# Altium PCB board.PcbDoc
Units mm, origin at the board's own origin, x right, y up, seen from the top; angles counter-clockwise.
Board outline 67.06 x 57.66 mm, 2 copper layers (Top Layer, Bottom Layer); 44 components, 74 nets, 216 pads, 48 vias.
Unrouted connection lines stored in the file: 1.
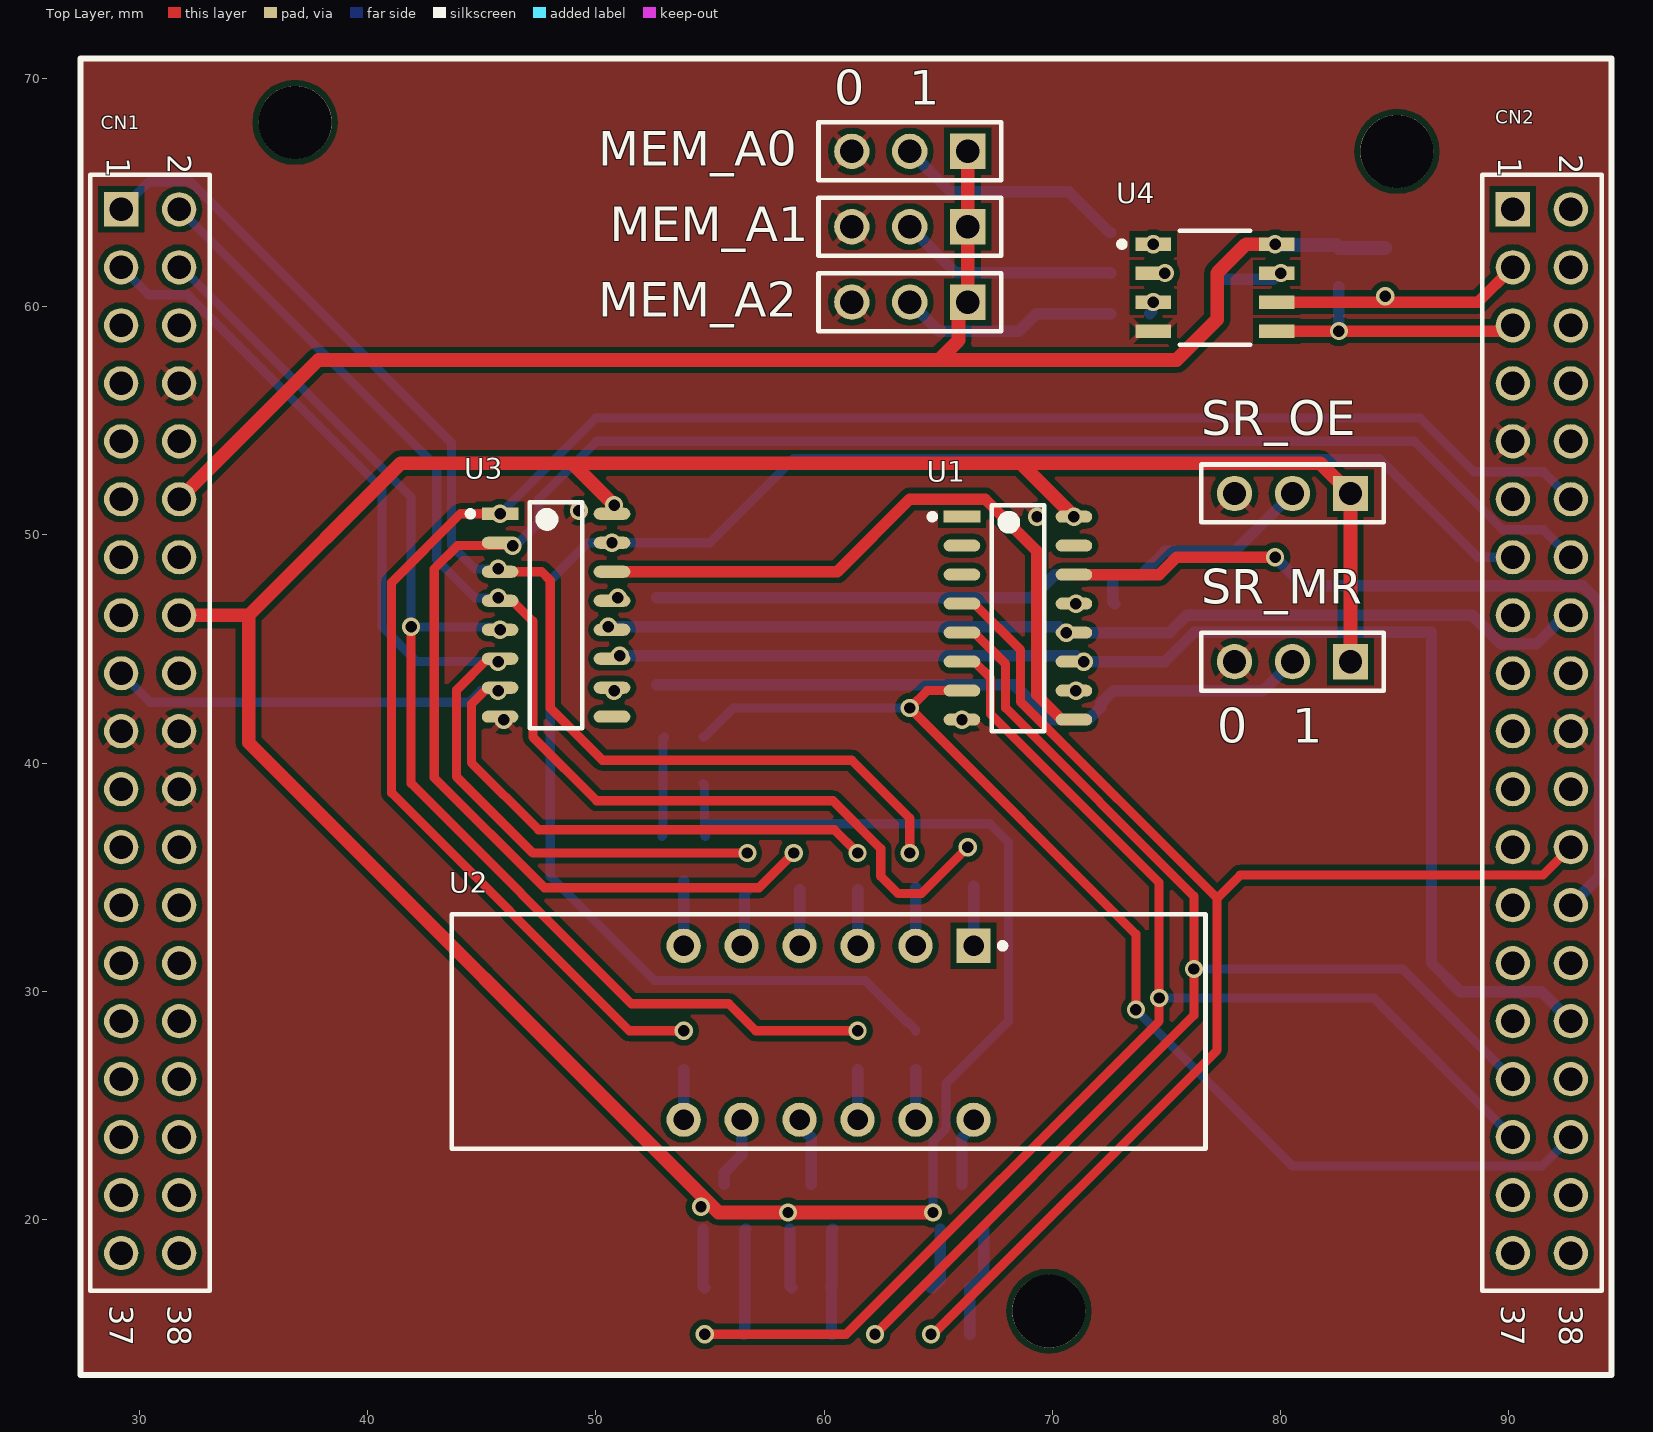
[diagram p0: Top Layer view]
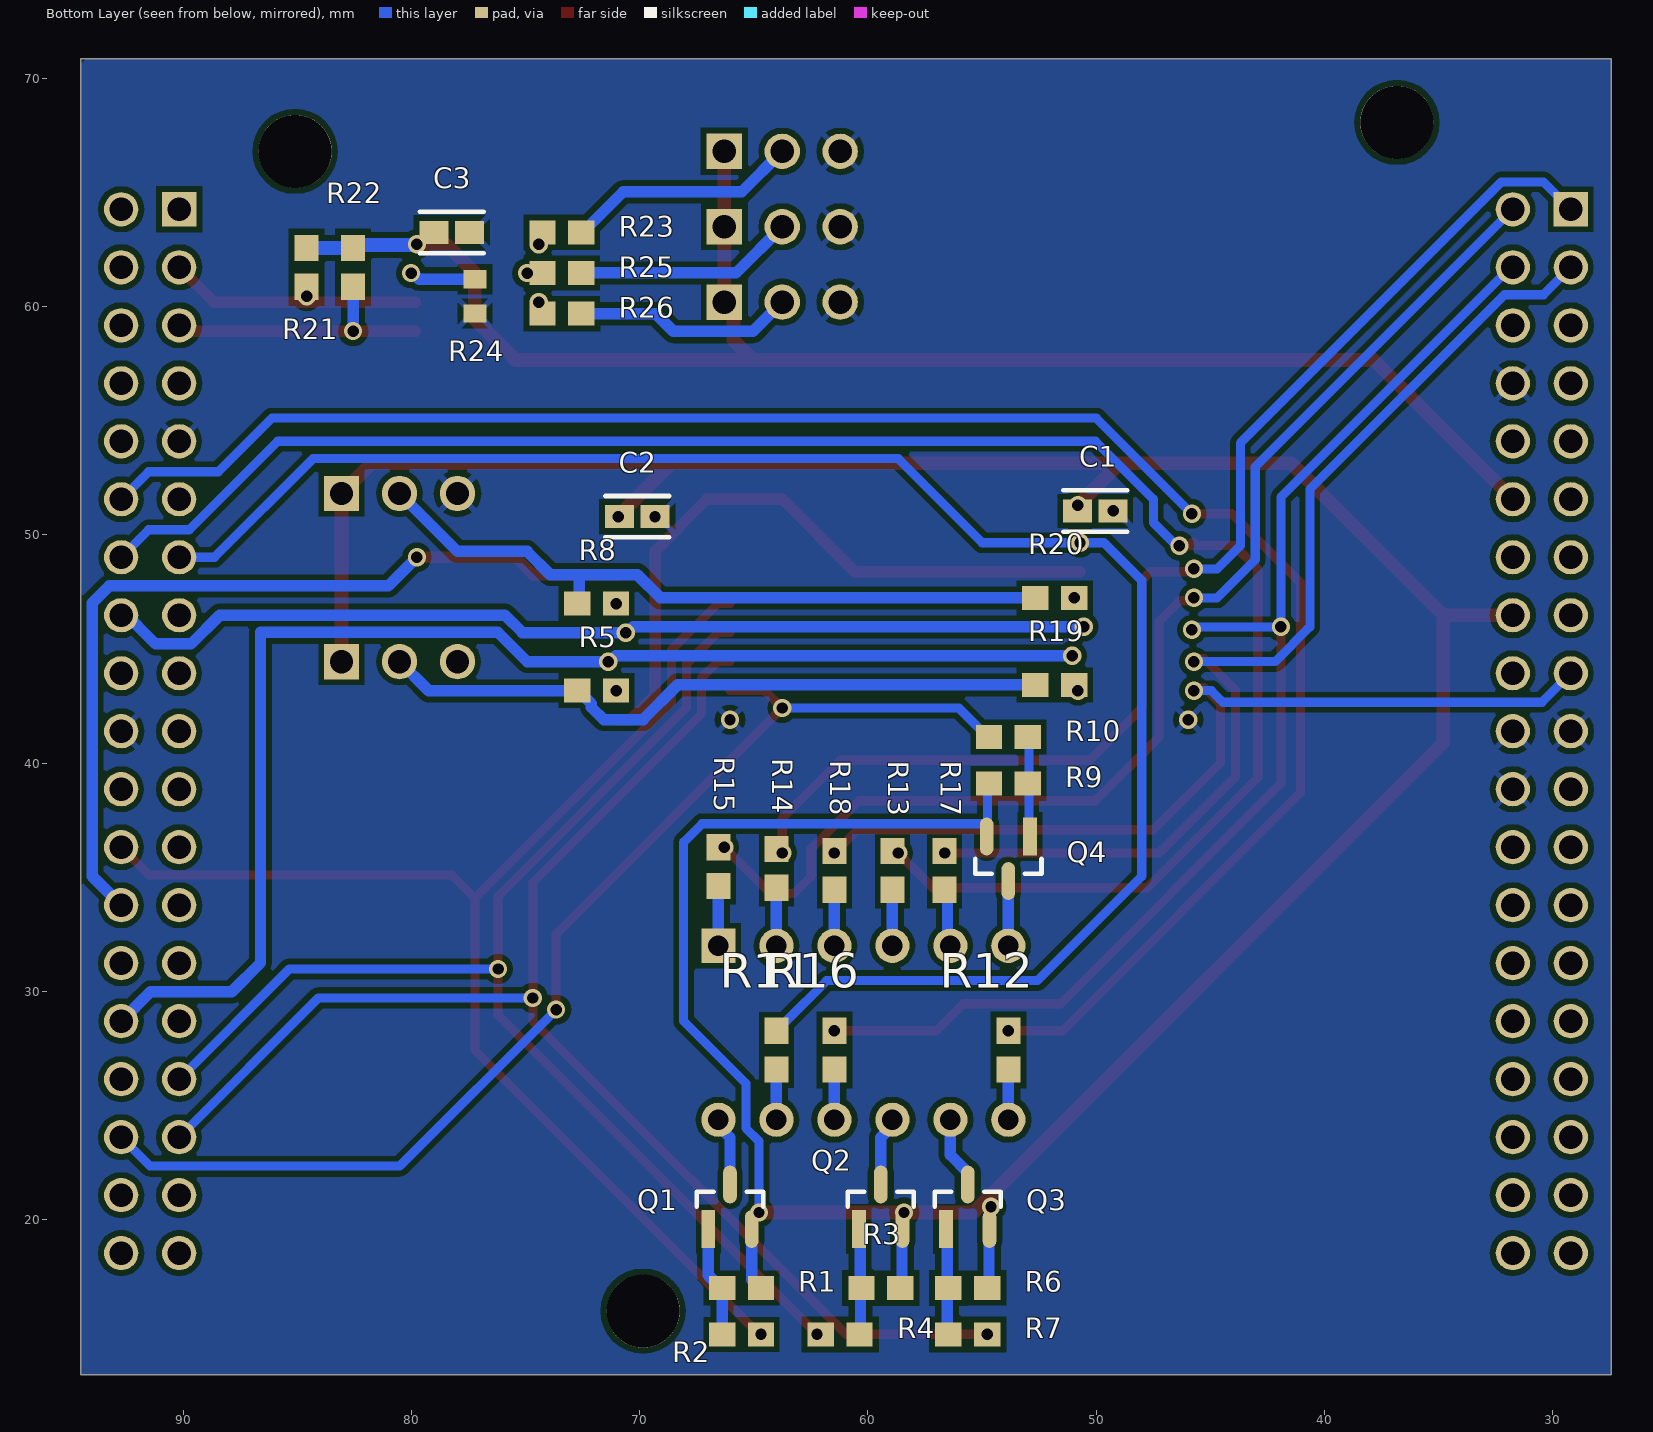
[diagram p1: Bottom Layer view, seen from below]
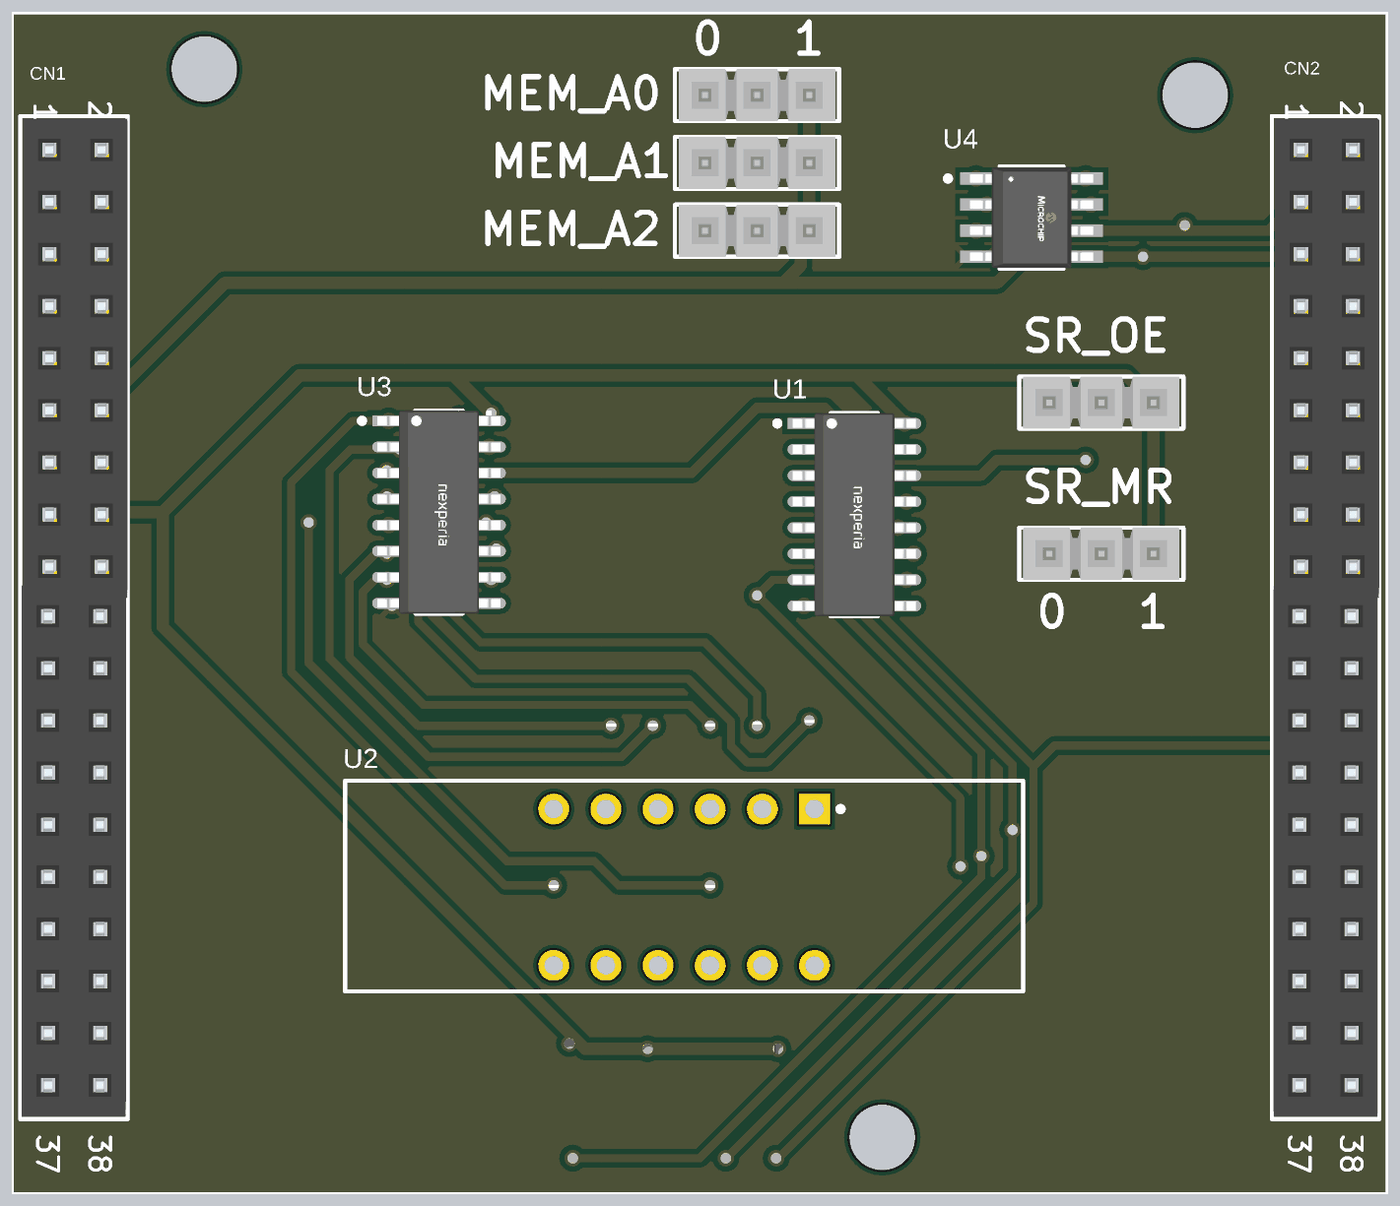
[diagram p2: 3D render of the assembled board from above, using the file's embedded part models]
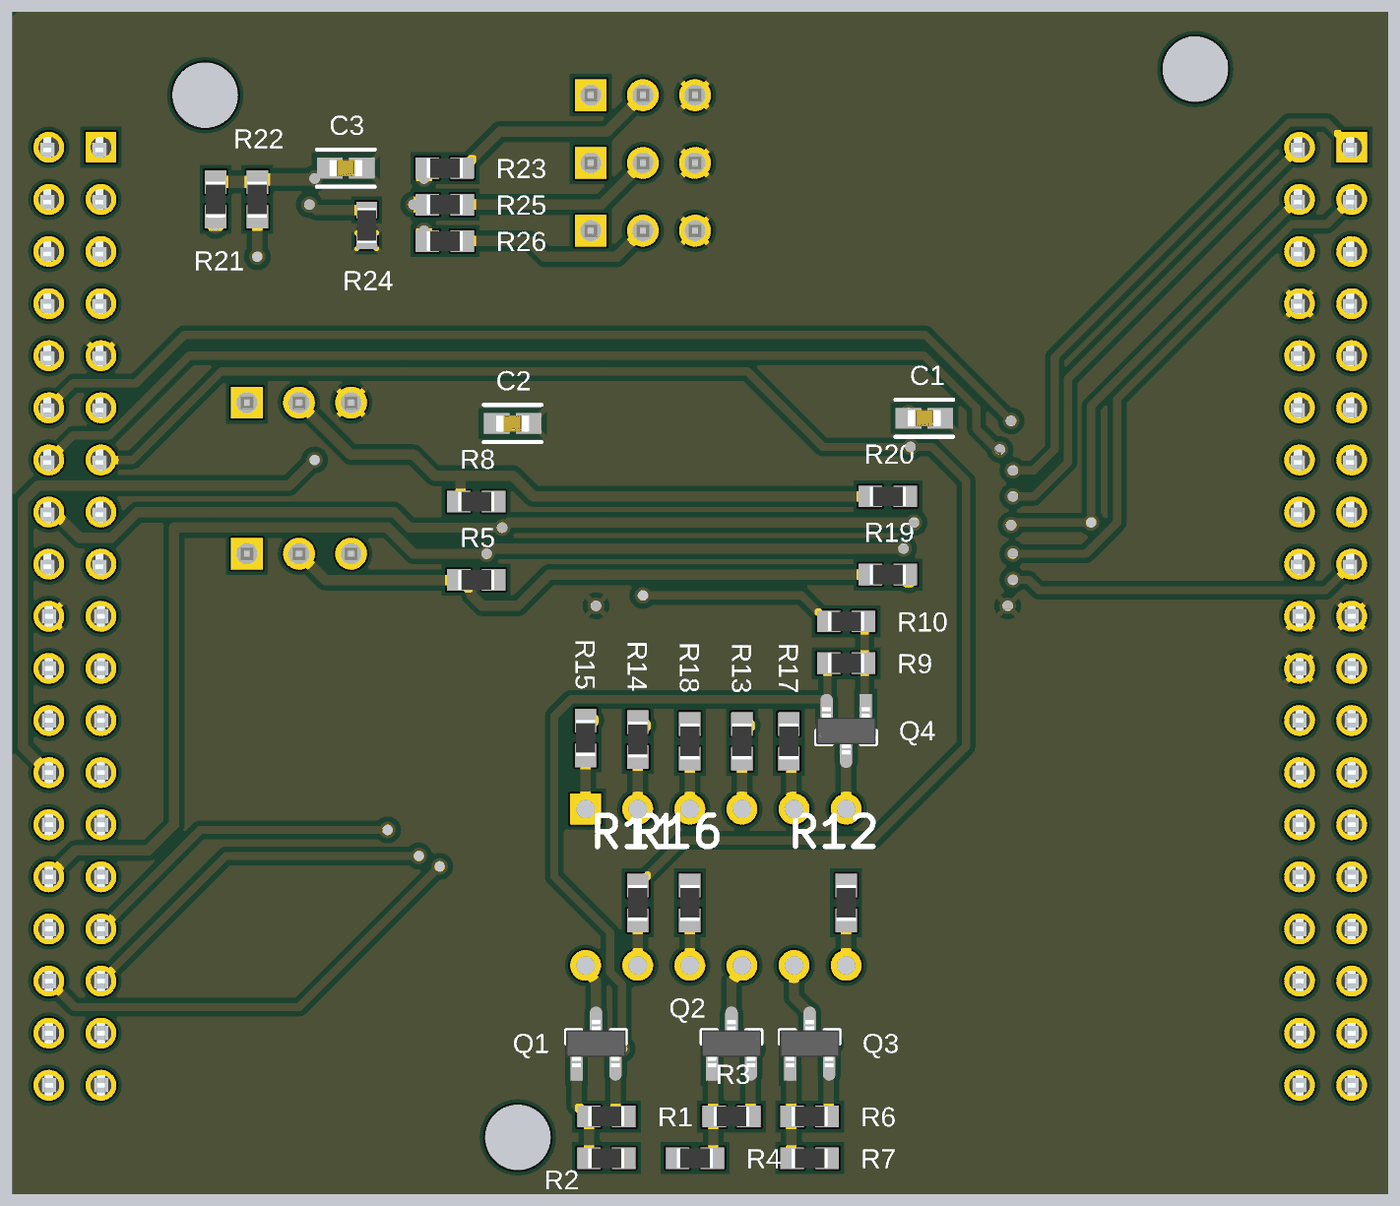
[diagram p3: 3D render of the assembled board from below, using the file's embedded part models]

## Layer stack, top to bottom
Top Solder: solder mask 0.0102, Solder Resist, Dk 3.5
Top Layer: signal copper 0.0356
Dielectric 1: dielectric 0.32, FR-4, Dk 4.8
Bottom Layer: signal copper 0.0356
Bottom Solder: solder mask 0.0102, Solder Resist, Dk 3.5

## Board outline
27.432,13.208 27.432,70.866 94.488,70.866 94.488,13.208

## Design rules (kind name [scope] priority, off if disabled: settings)
Clearance [All] p1: gap=0.254 ignorepadtopadclearanceinfootprint=FALSE
PlaneConnect [All] p1: planeconnectstyle=Direct reliefexpansion=0.508 reliefentries=4 reliefconductorwidth=0.254 reliefairgap=0.254
PolygonConnect [All] p1: connectstyle=Relief reliefconductorwidth=0.254 reliefentries=4 polygonreliefangle="45 Angle" airgapwidth=0.254
RoutingVias [All] p1: holewidth=0.5 width=0.8 viastyle="Through Hole" minholewidth=0.5 minwidth=0.8 maxholewidth=5 maxwidth=10
SolderMaskExpansion [All] p1: expansion=0.102
Width [All] p1: maxlimit=1 minlimit=0.4 preferedwidth=0.5
29 further rules are at their usual default settings.

## Components (designator, comment, footprint, x,y, rotation, side; value= is the part's Value field where it differs from the comment)
C1 "UMK107BJ104KAHT" FP-0603-L_1_6_0_1-W_0_8_0-IPC_A 50.038,51.054 r0 bottom
C2 "UMK107BJ104KAHT" FP-0603-L_1_6_0_1-W_0_8_0-IPC_A 70.104,50.8 r0 bottom
C3 "UMK107BJ104KAHT" FP-0603-L_1_6_0_1-W_0_8_0-IPC_A 78.232,63.246 r0 bottom
CN1 "Header 19X2" "header 38" 29.21,64.262 r270 top locked
CN2 "Header 19X2" "header 38" 90.17,64.262 r270 top locked
MEM_A0 "TSW-103-07-F-S" SMTC-TSW-103-07-X-S 66.294,66.802 r180 top
MEM_A1 "TSW-103-07-F-S" SMTC-TSW-103-07-X-S 66.294,63.5 r180 top
MEM_A2 "TSW-103-07-F-S" SMTC-TSW-103-07-X-S 66.294,60.198 r180 top
Q1 "BC807-40,215" FP-SOT23-IPC_A 66.04,20.574 r90 bottom
Q2 "BC807-40,215" FP-SOT23-IPC_A 59.436,20.574 r90 bottom
Q3 "BC807-40,215" FP-SOT23-IPC_A 55.626,20.574 r90 bottom
Q4 "BC807-40,215" FP-SOT23-IPC_A 53.848,35.814 r270 bottom
R1 "ERJ3EKF1002V" RESC1609X55X30ML15T15 65.532,17.018 r180 bottom value=100k
R2 "ERJ3EKF1002V" RESC1609X55X30ML15T15 65.532,14.986 r0 bottom value=10k
R3 "ERJ3EKF1002V" RESC1609X55X30ML15T15 59.436,17.018 r180 bottom value=100k
R4 "ERJ3EKF1002V" RESC1609X55X30ML15T15 61.214,14.986 r180 bottom value=10k
R5 "ERJ-3EKF4701V" RESC1608X55X30ML15T15 71.882,43.18 r0 bottom value=4k7
R6 "ERJ3EKF1002V" RESC1609X55X30ML15T15 55.626,17.018 r180 bottom value=100k
R7 "ERJ3EKF1002V" RESC1609X55X30ML15T15 55.626,14.986 r0 bottom value=10k
R8 "ERJ-3EKF4701V" RESC1608X55X30ML15T15 71.882,46.99 r0 bottom value=4k7
R9 "ERJ3EKF1002V" RESC1609X55X30ML15T15 53.848,39.116 r0 bottom value=100k
R10 "ERJ3EKF1002V" RESC1609X55X30ML15T15 53.848,41.148 r180 bottom value=10k
R11 "ERJ3EKF1002V" RESC1609X55X30ML15T15 64.008,27.432 r270 bottom value=220
R12 "ERJ3EKF1002V" RESC1609X55X30ML15T15 53.848,27.432 r270 bottom value=220
R13 "ERJ3EKF1002V" RESC1609X55X30ML15T15 58.928,35.306 r270 bottom value=220
R14 "ERJ3EKF1002V" RESC1609X55X30ML15T15 64.008,35.394 r270 bottom value=220
R15 "ERJ3EKF1002V" RESC1609X55X30ML15T15 66.548,35.472 r270 bottom value=220
R16 "ERJ3EKF1002V" RESC1609X55X30ML15T15 61.468,27.432 r270 bottom value=220
R17 "ERJ3EKF1002V" RESC1609X55X30ML15T15 56.642,35.306 r270 bottom value=220
R18 "ERJ3EKF1002V" RESC1609X55X30ML15T15 61.468,35.306 r270 bottom value=220
R19 "ERJ-3EKF4701V" RESC1608X55X30ML15T15 51.816,43.434 r0 bottom value=4k7
R20 "ERJ-3EKF4701V" RESC1608X55X30ML15T15 51.816,47.244 r0 bottom value=4k7
R21 "ERJ-3EKF4701V" RESC1608X55X30ML15T15 84.582,61.722 r90 bottom value=4k7
R22 "ERJ-3EKF4701V" RESC1608X55X30ML15T15 82.55,61.722 r90 bottom value=4k7
R23 "ERJ-3EKF4701V" RESC1608X55X30ML15T15 73.406,63.246 r180 bottom value=4k7
R24 "RC0603FR-074K7L" RESC1608X55X25ML10T15 77.216,60.452 r270 bottom
R25 "ERJ-3EKF4701V" RESC1608X55X30ML15T15 73.406,61.468 r180 bottom value=4k7
R26 "ERJ-3EKF4701V" RESC1608X55X30ML15T15 73.406,59.69 r180 bottom value=4k7
SR_MR "TSW-103-07-F-S" SMTC-TSW-103-07-X-S 83.058,44.45 r180 top
SR_OE "TSW-103-07-F-S" SMTC-TSW-103-07-X-S 83.058,51.816 r180 top
U1 "74HC595D,118" FP-SOT109-1-IPC_C 68.491,46.355 r0 top
U2 "2481A" 2481A 61.468,28.194 r180 top
U3 "74HC595D,118" FP-SOT109-1-IPC_C 48.26,46.482 r0 top
U4 "AT24C256C-SSHL-T" FP-C04-057-SN-MFG 77.122,60.833 r0 top

## Footprints (in the part's own frame and the unit in brackets; to place one, negate y for a bottom-side part, rotate by r counter-clockwise, add the part's x,y. Pads: shape width x height; smd on the part's side, far side on the other; paste and mask are expansions set on the pad)
2481A [mm]
  rect 1.5x1.5 hole 0.9: 1(-5.08,-3.81)
  round 1.5 hole 0.9: 2(-2.54,-3.81) 3(0,-3.81) 4(2.54,-3.81) 5(5.08,-3.81) 6(7.62,-3.81) 7(7.62,3.81) 8(5.08,3.81) 9(2.54,3.81) 10(0,3.81) 11(-2.54,3.81) 12(-5.08,3.81)
  silkscreen extent -15.24,-5.19 17.78,5.08, body extent -15.24,-5.14 17.78,5.14, height 5
FP-0603-L_1_6_0_1-W_0_8_0-IPC_A [mm]
  rect 1.258x1.012 smd paste+0 mask+0: 1(-0.777,0) 2(0.777,0)
  silkscreen extent -1.41,-0.91 1.41,0.91, body extent -0.8,-0.4 0.8,0.4, height 0.9
FP-C04-057-SN-MFG [mm]
  rect 1.55x0.6 smd paste+0 mask+0: 1(-2.7,1.905) 2(-2.7,0.635) 3(-2.7,-0.635) 4(-2.7,-1.905) 5(2.7,-1.905) 6(2.7,-0.635) 7(2.7,0.635) 8(2.7,1.905)
  silkscreen extent -4.2,-2.5 1.55,2.5, body extent -3.57,-2.75 3.57,2.75, height 0.25
FP-SOT23-IPC_A [mm]
  rect 1.655x0.602 smd paste+0 mask+0: 1(-0.975,0.95)
  rrect100% 1.655x0.602 smd paste+0 mask+0: 2(-0.975,-0.95) 3(0.975,0)
  silkscreen extent 0,-1.45 0.65,1.45, body extent -1.15,-1.45 1.15,1.45, height 1.1
FP-SOT109-1-IPC_C [mm]
  rect 1.604x0.528 smd paste+0 mask+0: 1(-2.451,4.445)
  rrect100% 1.604x0.528 smd paste+0 mask+0: 2(-2.451,3.175) 3(-2.451,1.905) 4(-2.451,0.635) 5(-2.451,-0.635) 6(-2.451,-1.905) 7(-2.451,-3.175) 8(-2.451,-4.445) 9(2.451,-4.445) 10(2.451,-3.175) 11(2.451,-1.905) 12(2.451,-0.635) 13(2.451,0.635) 14(2.451,1.905) 15(2.451,3.175) 16(2.451,4.445)
  silkscreen extent -3.88,-4.95 1.15,4.95, body extent -3.35,-5.05 3.35,5.05, height 0.25
"header 38" [mm] "Socket Header, Pitch 2.54 mm, THT, Vertical, dual row, 18p"
  rect 1.5x1.5 hole 1.02: 1(0,0)
  round 1.5 hole 1.02: 2(0,2.54) 3(2.54,0) 4(2.54,2.54) 5(5.08,0) 6(5.08,2.54) 7(7.62,0) 8(7.62,2.54) 9(10.16,0) 10(10.16,2.54) 11(12.7,0) 12(12.7,2.54) 13(15.24,0) 14(15.24,2.54) 15(17.78,0) 16(17.78,2.54) 17(20.32,0) 18(20.32,2.54) 19(22.86,0) 20(22.86,2.54) 21(25.4,0) 22(25.4,2.54) 23(27.94,0) 24(27.94,2.54) 25(30.48,0) 26(30.48,2.54) 27(33.02,0) 28(33.02,2.54) 29(35.56,0) 30(35.56,2.54) 31(38.1,0) 32(38.1,2.54) 33(40.64,0) 34(40.64,2.54) 35(43.18,0) 36(43.18,2.54) 37(45.72,0) 38(45.72,2.54)
  silkscreen extent -1.52,-1.34 47.37,3.88, body extent -1.4,-1.27 47.24,3.89, height 8.45
RESC1608X55X25ML10T15 [mm] "Chip Resistor, 2-Leads, Body 1.70x0.90mm, IPC Low Density"
  rect 0.8x1 smd: 1(-0.75,0) 2(0.75,0)
  body extent -0.85,-0.45 0.85,0.45, height 0.55
RESC1608X55X30ML15T15 [mm] "Chip Resistor, 2-Leads, Body 1.75x0.95mm, IPC Low Density"
  rect 1.15x1.05 smd: 1(-0.85,0) 2(0.85,0)
  body extent -0.87,-0.48 0.88,0.47, height 0.55
RESC1609X55X30ML15T15 [mm] "Chip Resistor, 2-Leads, Body 1.75x0.95mm, IPC Low Density"
  rect 1.15x1.05 smd: 1(-0.85,0) 2(0.85,0)
  body extent -0.87,-0.48 0.87,0.48, height 0.55
SMTC-TSW-103-07-X-S [mm] ".025 SQ Post Terminal Strip Assembly, 1x3 Pins, Vertical, 2.54mm Pitch, Male"
  rect 1.55x1.55 hole 1.02: 1(0,0)
  round 1.55 hole 1.02: 2(2.54,0) 3(5.08,0)
  silkscreen extent -1.46,-1.27 6.54,1.27, body extent -1.27,-1.27 6.35,1.27, height 8.38

## Part data
C1 C2 C3: library part CMP-14477-000532-1, "Ceramic Capacitor Automotive 0.1uF ±10% 50V X5R 0603", Capacitance=100nF, Case/Package=0603, Case Code (Metric)=1608, Dielectric=X5R, Max Operating Temperature=85°C, Min Operating Temperature=-55°C, Package Quantity=4000, Ratings=AEC-Q200, Tolerance=10%, Voltage Rating=50V, Case Code (Imperial)=0603, Halogen Free="Halogen Free", Height=0.8mm, Lead Free="Lead Free", Length=0.063inch, Mount="Surface Mount", Packaging="Tape and Reel", RoHS Compliant=Yes, Termination=SMD/SMT, Thickness=0.035inch, Voltage Rating (DC)=50V, Width=0.031inch
CN1 CN2: "Header, 19-Pin, Dual row", Publisher="Altium Limited", Revision="17-Jul-2002: Re-released for DXP Platform."
MEM_A0 MEM_A1 MEM_A2 SR_MR SR_OE: library part CMP-1024-00331-1, "0.025\" SQ Post Header, Through-hole, Vertical, -55 to 125 degC, 2.54 mm Pitch, 3-Pin, Male, RoHS", Manufacturer=Samtec, Temperature Range="-55 to 125 degC", ComponentLink1Description="Manufacturer URL", ComponentLink1URL=http://www.samtec.com, ComponentLink2Description=Datasheet, ComponentLink2URL=http://www.samtec.com/documents/webfiles/pdf/TSW_TH.PDF, ComponentLink3Description="Package Specification", ComponentLink3URL=http://www.samtec.com/documents/webfiles/cpdf/TSW-XXX-XX-XXX-X-XX-XXX-MKT.pdf, DatasheetVersion=F-214, Mounting Technology=Through-hole, Orientation=Vertical, PackageDescription=".025[0.64] SQ. Post Terminal Strip Assembly", PackageReference=TSW-103-07-X-S, PackageVersion="DM, 8/1988", PartNumber=TSW-103-07-F-S, Pitch="2.54 mm", RoHS=True
Q1 Q2 Q3 Q4: library part CMP-14406-000042-1, "TRANS PNP 45V 500MA TO236AB", RoHS Compliant=Yes
R1 R2 R3 R4 R6 R7 R9 R10 R11 R12 R13 R14 R15 R16 R17 R18: library part CMP-1012-00623-3, "Chip Resistor, 10 KOhm, +/- 1%, 0.1 W, -55 to 155 degC, 0603 (1608 Metric), RoHS, Tape and Reel", Case\/Package=0603, Case Code (Metric)=1608, Manufacturer=Panasonic, Max Operating Temperature=155degC, Max Power Dissipation=100mW, Min Operating Temperature=-55degC, Package Description="2-Pin Surface Mount Device, Body 1.6 x 0.85 mm", Package Quantity=1, Package Reference=603, Resistance=10KOhm, Temperature Coefficient=100ppm\/degreesC, Tolerance=1%, Voltage Rating=75V, Case Code (Imperial)=0603, Composition=ThickFilm, Contact Plating=Tin, Datasheet URL=https://industrial.panasonic.com/cdbs/www-data/pdf/RDA0000/AOA0000C304.pdf, Datasheet Version=02/2017, Depth=0.8mm, Height=0.45mm, Lead Free=LeadFree, Length=1.6mm, Manufacturer URL=http://www.panasonic.com/, Military Standard=Not, Mount=SurfaceMount, Mounting Technology=SurfaceMount, Number of Pins=2, Number of Terminations=2, Packaging=TapeandReel, Power Rating=100mW, Radiation Hardening=No, REACH SVHC=NoSVHC, RoHSCompliant=true, Termination=SMD/SMT, Voltage Rating (DC)=75V, Width=0.031inch
R5 R8 R19 R20 R21 R22 R23 R25 R26: library part CMP-1012-00586-3, "Precision Thick Film Chip Resistor, 4.7 KOhm, +/- 1%, -55 to 155 degC, 0603 (1608 Metric), RoHS, Tape and Reel", Case\Package=1205, Case Code (Imperial)=1206, Case Code (Metric)=3216, Max Operating Temperature="125 degC", Min Operating Temperature="-55 degC", Package Quantity=1, Power Rating="250 mW", Resistance="220 Ohm", Tolerance=5%, Type (Resistor)="Thick Film", Voltage Rating="50 V", ComponentLink1Description="Manufacturer URL", ComponentLink1URL=http://www.panasonic.com/, ComponentLink2Description=Datasheet, ComponentLink2URL=http://industrial.panasonic.com/cdbs/www-data/pdf/RDA0000/AOA0000C86.pdf, DatasheetVersion=Apr-15, Elements=4, Height="0.024 inch", Length="0.126 inch", Mount="Surface Mount", PackageDescription="2-Pin Surface Mount Device, Body 1.6 x 0.85 mm", PackageReference=0603, Packaging="Tape and Reel", Pins=8, Radiation Hardening=No, REACH SVHC="No SVHC", RoHSCompliant=true, Width="0.063 inch"
R24: library part CMP-2000-06942-1, "Chip Resistor, 4.7 KOhm, +/- 1%, 0.1 W, -55 to 155 degC, 0603 (1608 Metric), RoHS, Tape and Reel", Case Code - in=0603, Case Code - mm=1608, Manufacturer=Yageo, Operating Temperature Range=-55Cto+155C, Package Description="2-Pin Surface Mount Device, Body 1.6 x 0.8 mm", Power Rating=100mW, Resistance=4.7k, Temperature Coefficient=100PPM/C, Tolerance=1%, Voltage Rating=50V, Datasheet URL=http://www.yageo.com/documents/recent/PYu-RC_Group_51_RoHS_L_7.pdf, Datasheet Version="Rev. 7, 05/2017", Manufacturer URL=http://www.yageo.com/, Mounting Technology=SurfaceMount, Package Reference=0603, Packaging=Reel, Product=ThickFilmResistorsGeneralPurpose, Series=RC, Termination Style=SMD/SMT
U1 U3: library part CMP-14351-000006-1, "IC SHIFT REGISTER 8BIT 16SOIC", RoHS Compliant=Yes
U2: "7-segment, common-catode"
U4: library part CMP-06313-000129-1, "IC EEPROM 1KBIT I2C 1MHZ 8SOIC", Case/Package=SOIC, Frequency=1MHz, Max Operating Temperature=85°C, Min Operating Temperature=-40°C, Access Time=4.5us, Memory Size=1Kb, Memory Type=Non-Volatile, Mount="Surface Mount", Number of Pins=8, Packaging="Cut Tape", RoHS Compliant=Yes, Series=-

## Free pads (board coordinates)
  round 3.2 hole 3.2 unplated: 0(36.83,68.072) 0(69.85,16.002) 0(85.09,66.802)

## Via types
v1: diameter 0.8, hole 0.5, Top Layer to Bottom Layer, tented both sides, 48 vias

## Nets (pads, with @x,y where several pads share a name; then routed paths per layer and width w, separated by ;. In a path a pad name is that pad's centre, name@x,y a point inside that pad or via, vN(x,y) a via of type N, cw(c..) or ccw(c..) an arc to the next point about the centre after c; other vN are vias at no path point)
+3V3: C1.2 C2.2 C3.2 CN1.12 CN1.16 MEM_A0.1 MEM_A1.1 MEM_A2.1 Q1.2 Q2.2 Q3.2 Q4.2 R1.2 R3.2 R6.2 R9.2 R21.2 R22.2 SR_MR.1 SR_OE.1 U1.16 U3.16 U4.8 | length 221.9
  Top Layer w0.6: CN1.12 37.846,57.658 65.024,57.658 ; CN1.16@32.258,46.482 34.798,46.482 ; v1(50.8,51.308) 49.022,53.086 49.022,53.145 ; v1(64.77,20.32) v1(58.42,20.32) 55.372,20.32 34.798,40.894 34.798,46.482 ; MEM_A0.1 MEM_A1.1 MEM_A2.1 65.889,59.793 65.889,58.523 65.024,57.658 ; v1(70.942,50.8) 68.597,53.145 ; v1(79.756,62.738) 78.486,62.738 77.216,61.468 77.216,59.436 75.438,57.658 65.024,57.658 ; SR_MR.1 SR_OE.1 81.729,53.145 68.597,53.145 ; 34.798,46.482 41.461,53.145 49.022,53.145 ; 49.022,53.145 68.597,53.145
  Bottom Layer w0.4: R9.2 54.759,39.055 54.759,36.828 Q4.2 54.798,37.257 54.892,37.351 67.261,37.351 68.072,36.54 68.072,28.702 65.344,25.974 65.344,24.017 64.77,23.443 v1(64.77,20.32)
  Bottom Layer w0.5: Q3.2@54.696,19.579 54.696,17.098 R6.2 ; Q2.2 58.506,19.579 58.506,17.098 R3.2 ; R1.2 64.732,17.018 65.09,17.376 Q1.2
  Bottom Layer w0.6: v1(79.756,62.738) 79.794,62.7 82.422,62.7 R22.2 R21.2
  other v1: 54.61,20.574
+5V: CN1.18
GND: C1.1 C2.1 C3.1 CN1.8 CN1.19 CN1.20 CN1.22 CN2.9 CN2.20 MEM_A0.3 MEM_A1.3 MEM_A2.3 R24.2 SR_MR.3 SR_OE.3 U1.8 U3.8 U4.4
  other v1: 45.974,41.91 66.04,41.91 69.327,50.8 49.261,51.054
NetMEM_A0_2: MEM_A0.2 R23.2 | length 10.3
  Bottom Layer w0.5: MEM_A0.2 65.532,65.024 70.728,65.024 72.506,63.246 R23.2
NetMEM_A1_2: MEM_A1.2 R25.2 | length 9.6
  Bottom Layer w0.5: MEM_A1.2 65.777,61.477 72.547,61.477 R25.2
NetMEM_A2_2: MEM_A2.2 R26.2 | length 9.7
  Bottom Layer w0.5: MEM_A2.2 65.033,58.919 68.523,58.919 69.294,59.69 R26.2
NetQ1_1: Q1.1 R1.1 R2.2 | length 4.9
  Bottom Layer w0.5: R2.2 R1.1 66.432,17.018 66.99,17.576 Q1.1
NetQ1_3: Q1.3 U2.12 | length 3
  Bottom Layer w0.5: Q1.3 66.04,23.605 66.548,24.113 U2.12
NetQ2_1: Q2.1 R3.1 R4.2 | length 4.7
  Bottom Layer w0.5: R4.2 60.325,15.025 60.325,16.979 R3.1 60.336,17.068 60.336,19.549 Q2.1
NetQ2_3: Q2.3 U2.9 | length 3
  Bottom Layer w0.5: U2.9 58.928,24.113 59.436,23.605 Q2.3
NetQ3_1: Q3.1 R6.1 R7.2 | length 4.7
  Bottom Layer w0.5: R7.2 56.526,15.036 56.526,19.549 Q3.1
NetQ3_3: Q3.3 U2.8 | length 3.2
  Bottom Layer w0.5: Q3.3 55.626,22.076 56.388,22.838 U2.8
NetQ4_1: Q4.1 R9.1 R10.2 | length 4.4
  Bottom Layer w0.4: Q4.1 52.948,36.839 52.948,41.098 R10.2
NetQ4_3: Q4.3 U2.6 | length 2.8
  Bottom Layer w0.5: U2.6 Q4.3
NetR5_1: R5.1 U1.10
  other v1: 71.032,43.18
NetR5_2: R5.2 R19.2 SR_MR.2 | length 29.6
  Bottom Layer w0.5: R19.2 68.326,43.434 69.85,41.91 71.575,41.91 72.111,42.446 72.111,42.609 72.682,43.18 R5.2 72.741,43.171 79.239,43.171 SR_MR.2
NetR8_1: R8.1 U1.13
  other v1: 71.032,46.99
NetR8_2: R8.2 R20.2 SR_OE.2 | length 31.1
  Bottom Layer w0.5: R20.2 69.088,47.244 70.104,48.26 72.644,48.26 ; R8.2 72.644,47.078 72.644,48.26 ; SR_OE.2 77.978,49.276 74.93,49.276 73.914,48.26 72.644,48.26
NetR11_2: R11.2 U2.11 | length 2.2
  Bottom Layer w0.5: U2.11 R11.2
NetR12_2: R12.2 U2.7 | length 2.2
  Bottom Layer w0.5: U2.7 R12.2
NetR13_2: R13.2 U2.4 | length 2.5
  Bottom Layer w0.5: U2.4 R13.2
NetR14_2: R14.2 U2.2 | length 2.5
  Bottom Layer w0.5: U2.2 R14.2
NetR15_2: R15.2 U2.1 | length 2.6
  Bottom Layer w0.5: U2.1 R15.2
NetR16_2: R16.2 U2.10 | length 2.2
  Bottom Layer w0.5: U2.10 R16.2
NetR17_2: R17.2 U2.5 | length 2.6
  Bottom Layer w0.5: U2.5 56.515,32.131 56.515,34.329 R17.2
NetR18_2: R18.2 U2.3 | length 2.5
  Bottom Layer w0.5: U2.3 R18.2
NetR19_1: R19.1 U3.10
  other v1: 50.8,43.18
NetR20_1: R20.1 U3.13
  other v1: 50.966,47.244
NetR23_1: R23.1 U4.1
  other v1: 74.422,62.738
NetR24_1: R24.1 U4.7 | length 2.9
  Bottom Layer w0.5: R24.1 79.663,61.202 79.929,61.468 v1(80.01,61.468)
NetR25_1: R25.1 U4.2
  other v1: 74.93,61.468
NetR26_1: R26.1 U4.3 | length 0.6
  Bottom Layer w0.5: R26.1 74.365,59.799 74.365,60.141 v1(74.422,60.198)
NetU1_9: U1.9 U3.14 | length 29.2
  Top Layer w0.5: U3.14 60.573,48.387 63.754,51.568 67.051,51.568 69.308,49.311 69.308,43.005 70.404,41.91 U1.9
PA0: CN1.28
PA1: CN1.30
PA4: CN1.32
PA6: CN2.13 R11.1 U3.15 | length 78
  Bottom Layer w0.4: R11.1 64.008,28.332 63.683,28.657 63.633,28.657 61.81,30.48 52.578,30.48 48.006,35.052 48.006,48.006 49.657,49.657 v1(50.711,49.657) 54.991,49.657 58.674,53.34 84.306,53.34 88.624,49.022 CN2.13
PA7: CN2.15
PA8: CN2.23
PA9: CN2.21
PA10: CN2.33 R7.1 U1.6 | length 63.2
  Top Layer w0.4: v1@54.864,14.986 60.96,14.986 74.676,28.702 v1(74.676,29.718) 74.676,34.772 67.296,42.152 67.296,43.732 66.578,44.45 U1.6
  Bottom Layer w0.4: v1(74.676,29.718) 84.074,29.718 CN2.33
  other v1: 54.776,14.986
PA11: CN2.14 R13.1 U3.2 | length 82.4
  Top Layer w0.4: U3.2@45.726,49.661 U3.2 ; v1(46.355,49.53) 43.942,49.53 42.926,48.514 42.926,39.37 47.752,34.544 57.15,34.544 v1(58.674,36.068)
  Bottom Layer w0.4: v1(46.355,49.53) 46.482,49.53 47.498,50.546 47.498,51.562 50.038,54.102 85.852,54.102 89.728,50.226 91.506,50.226 CN2.14
PA12: CN2.12 R12.1 U3.1 | length 82.4
  Top Layer w0.4: v1(45.809,50.927) 44.069,50.927 41.056,47.914 41.056,38.7 51.474,28.282 v1(53.848,28.282)
  Bottom Layer w0.4: v1(45.809,50.927) 50,55.118 86.106,55.118 88.458,52.766 91.506,52.766 CN2.12
PA15: CN1.17 R18.1 U3.7 | length 39.9
  Top Layer w0.4: U3.7 45.271,43.307 44.553,42.589 44.553,40.029 47.498,37.084 60.452,37.084 v1(61.468,36.068)
  Bottom Layer w0.4: CN1.17 30.48,42.672 44.45,42.672 44.958,43.18 v1(45.72,43.18)
PB0: CN1.34
PB1: CN2.24 R2.1 U1.4 | length 58.5
  Top Layer w0.4: v1@64.77,14.986 77.216,27.432 77.216,34.082 ; U1.4 66.578,46.99 68.604,44.964 68.604,42.694 77.216,34.082 ; CN2.24 91.485,35.097 78.231,35.097 77.216,34.082
  other v1: 64.682,14.986
PB2: CN2.22
PB3: CN2.31 R4.1 U1.5 | length 57
  Top Layer w0.4: v1(62.23,14.986) 76.2,28.956 v1(76.2,30.988) 76.2,34.173 67.95,42.423 67.95,44.348 66.578,45.72 U1.5
  Bottom Layer w0.4: v1(76.2,30.988) 85.344,30.988 CN2.31
PB4: CN2.27
PB5: CN2.29
PB6: CN2.17
PB7: CN1.21
PB8: CN2.3 R21.1 U4.6 | length 11
  Top Layer w0.5: U4.6 88.646,60.198 CN2.3
  other v1: 84.582,60.452
PB9: CN2.5 R22.1 U4.5 | length 14.3
  Top Layer w0.5: U4.5 89.645,58.928 89.899,59.182 CN2.5
  Bottom Layer w0.5: v1(82.55,58.928) R22.1 v1(82.55,58.928)
PB10: CN2.25
PB12: CN2.16 U1.12 U3.12 | length 44
  Bottom Layer w0.5: v1(50.546,45.974) 70.277,45.974 70.531,45.72 v1(70.612,45.72) 75.134,45.72 75.897,46.483 88.396,46.483 89.651,45.228 91.202,45.228 92.71,46.736 CN2.16
PB13: CN2.30 U1.11 U3.11 | length 57.8
  Bottom Layer w0.5: v1(51.054,44.704) 71.039,44.704 71.293,44.45 v1(71.374,44.45) 74.93,44.45 76.209,45.729 86.605,45.729 86.605,31.251 87.868,29.988 91.424,29.988 CN2.30
PB14: CN2.28
PB15: CN2.26 U1.14 | length 37.9
  Top Layer w0.5: U1.14 74.676,48.26 75.438,49.022 v1(79.756,49.022)
  Bottom Layer w0.5: v1(79.756,49.022) 81.01,47.768 93.229,47.768 93.98,47.017 93.98,35.052 CN2.26
PC0: CN1.38
PC1: CN1.36
PC2: CN1.35
PC3: CN1.37
PC4: CN2.34 R10.1 U1.7 | length 51.7
  Top Layer w0.4: U1.7 64.516,43.18 v1(63.754,42.418) 73.66,32.512 v1@73.66,29.464
  Bottom Layer w0.4: R10.1 54.748,41.148 56.018,42.418 v1(63.754,42.418) ; v1(73.66,29.21) 80.518,22.352 91.44,22.352 CN2.34
PC5: CN2.6
PC6: CN2.4
PC7: CN2.19
PC8: CN2.2
PC9: CN2.1
PC10: CN1.1 R14.1 U3.3 | length 53.6
  Top Layer w0.4: U3.3 47.625,48.387 48.006,48.006 48.006,42.418 50.292,40.132 61.214,40.132 63.754,37.592 v1(63.754,36.068)
  Bottom Layer w0.4: CN1.1 30.414,65.466 32.249,65.466 43.688,54.027 43.688,49.53 44.704,48.514 v1@45.466,48.514
  other v1: 45.72,48.514
PC11: CN1.2 R15.1 U3.4 | length 53.7
  Top Layer w0.4: U3.4 46.347,47.117 47.244,46.22 47.244,41.148 50.038,38.354 60.39,38.354 62.484,36.26 62.484,35.052 63.246,34.29 64.262,34.29 v1(66.294,36.322)
  Bottom Layer w0.4: CN1.2 43.034,52.978 43.034,48.914 44.704,47.244 v1(45.72,47.244)
PC12: CN1.3 R17.1 U3.6 | length 47.3
  Top Layer w0.4: U3.6 45.271,44.577 43.899,43.205 43.899,39.413 47.244,36.068 v1(56.642,36.068)
  Bottom Layer w0.4: CN1.3 30.414,60.518 32.117,60.518 40.64,51.995 40.64,45.974 42.164,44.45 v1@45.466,44.45
  other v1: 45.72,44.45
PC13: CN1.23
PD2: CN1.4 R16.1 U3.5 | length 54.8
  Top Layer w0.4: v1(41.91,45.974) 41.91,39.116 51.562,29.464 55.822,29.464 57.004,28.282 v1(61.468,28.282)
  Bottom Layer w0.4: CN1.4 31.838,61.722 41.91,51.65 v1(41.91,45.974) v1@45.809,45.974
  other v1: 45.809,45.847
pads on no net: CN1.5 CN1.6 CN1.7 CN1.9 CN1.10 CN1.11 CN1.13 CN1.14 CN1.15 CN1.24 CN1.25 CN1.26 CN1.27 CN1.29 CN1.31 CN1.33 CN2.7 CN2.8 CN2.10 CN2.11 CN2.18 CN2.32 CN2.35 CN2.36 CN2.37 CN2.38 U1.1 U1.2 U1.3 U1.15 U3.9

## Polygon pours and split planes (outlines as drawn)
GND on Bottom Layer "Bottom Layer-GND" (solid, pour order 2): 27.432,70.866 94.234,70.866 94.488,70.612 94.488,13.208 27.432,13.208
GND on Top Layer "Top Layer-GND" (solid, pour order 0): 27.432,70.866 94.488,70.866 94.488,13.208 27.432,13.208

## Silkscreen, mask and mechanical layers (free items; w line width, h text height)
Top Overlay:
  lines w0.2: 27.432,13.208 94.488,13.208 94.488,70.866 27.432,70.866 27.432,13.208
  lines w0.254: 27.432,13.208 94.488,13.208 94.488,70.866 27.432,70.866 27.432,13.208
  text "0   1" at 60.452,68.834 h1.52
  text "0   1" at 77.216,40.894 h1.52

## Dimensions
27.432,70.866 to 27.432,13.208 on Top Overlay
27.432,70.866 to 94.488,70.866 on Top Overlay

## Text inside footprints (layer, text, board x,y; h text height)
CN1: Top Overlay "37" at 28.702,16.256 h1.02 r270; Top Overlay "38" at 31.242,16.256 h1.02 r270; Top Overlay "2" at 31.242,66.675 h1.02 r270; Top Overlay "1" at 28.575,66.548 h1.02 r270
CN2: Top Overlay "1" at 89.535,66.548 h1.02 r270; Top Overlay "2" at 92.202,66.675 h1.02 r270; Top Overlay "38" at 92.202,16.256 h1.02 r270; Top Overlay "37" at 89.662,16.256 h1.02 r270